# Altium PCB cps_tc_onoff_sw.PcbDoc
Units mm, origin at the board's own origin, x right, y up, seen from the top; angles counter-clockwise.
Board outline 40 x 22 mm, 2 copper layers (Top Layer, Bottom Layer); 12 components, 9 nets, 35 pads, 10 vias.
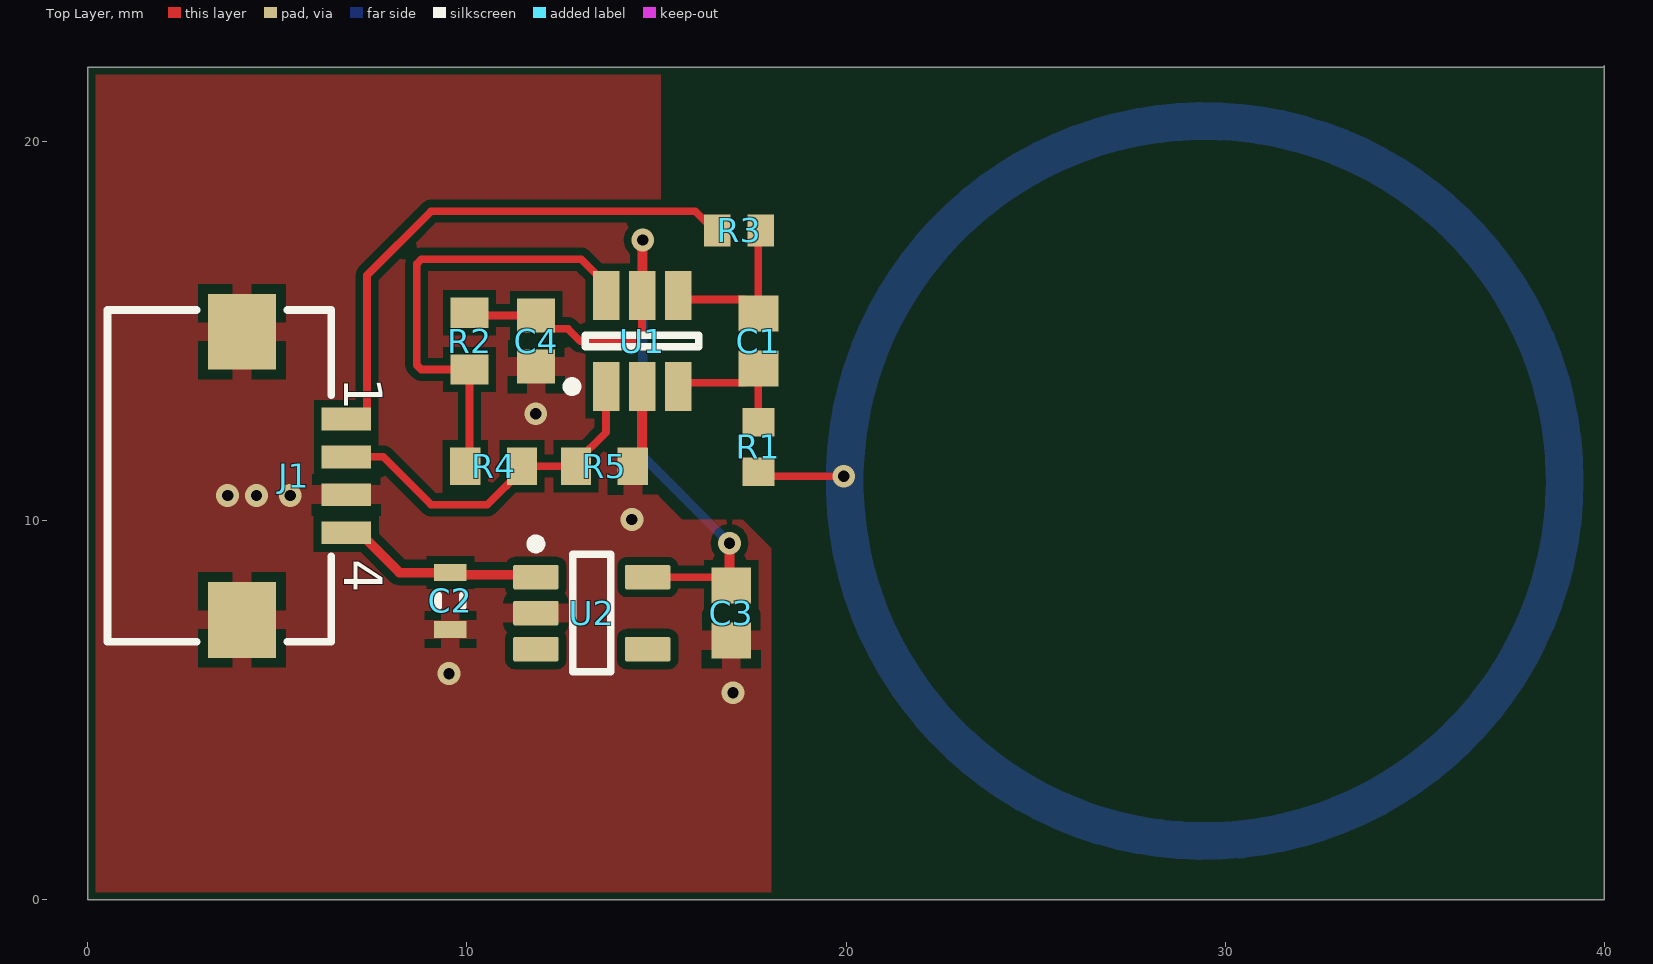
[diagram p0: Top Layer view]
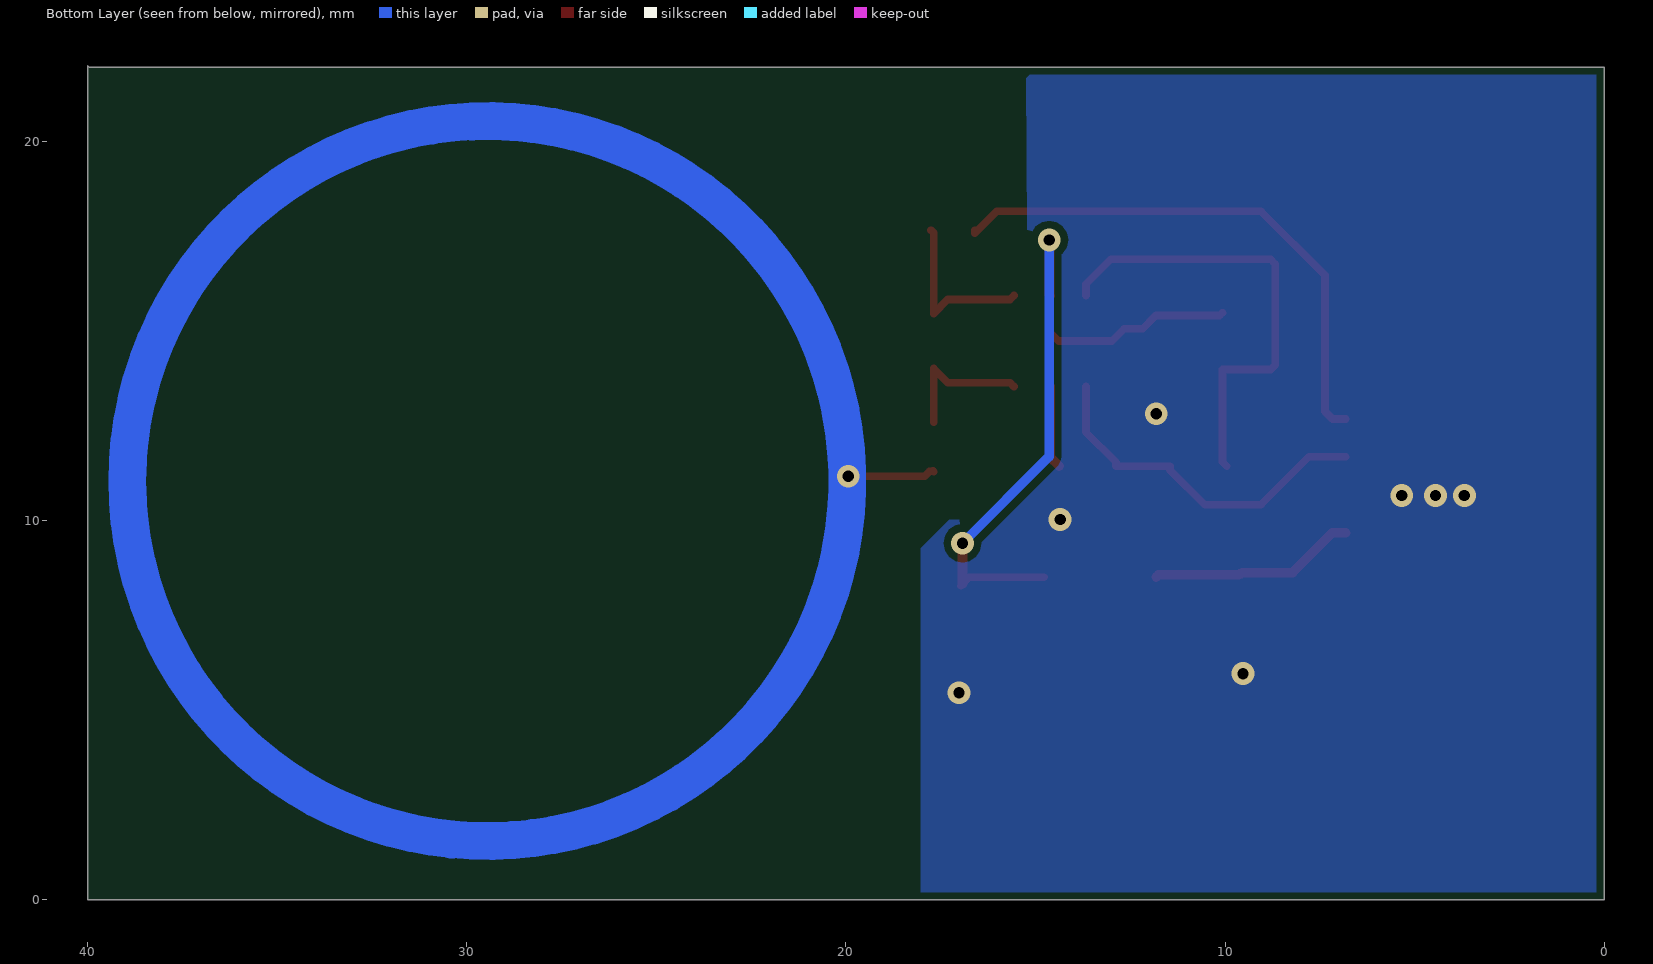
[diagram p1: Bottom Layer view, seen from below]

## Layer stack, top to bottom
Top Solder: solder mask 0.0102, Solder Resist, Dk 3.5
Top Layer: signal copper 0.0356
Dielectric 1: dielectric 0.32, FR-4, Dk 4.8
Bottom Layer: signal copper 0.0356
Bottom Solder: solder mask 0.0102, Solder Resist, Dk 3.5

## Board outline
0,0 40,0 40,22 39.971,21.971 0,21.971

## Design rules (kind name [scope] priority, off if disabled: settings)
BoardOutlineClearance [All] p1: gap=0.2 ignorepadtopadclearanceinfootprint=FALSE except(0.4: Arc-SplitBarrior Arc-SplitContinuation Track-SplitBarrior Track-SplitContinuation SMDPad-SplitBarrior SMDPad-SplitContinuation THPad-SplitBarrior THPad-SplitContinuation Via-SplitBarrior Via-SplitContinuation Fill-SplitBarrior Fill-SplitContinuation Poly-SplitBarrior Poly-SplitContinuation Region-SplitBarrior Region-SplitContinuation Text-SplitBarrior Text-SplitContinuation)
Clearance "Clearance Bottom Layer" [OnLayer('Bottom Layer')] p1: gap=0.203 ignorepadtopadclearanceinfootprint=TRUE except(0.254: Arc-Text Track-Text SMDPad-Text THPad-Text Via-Text Fill-Text Poly-Text Region-Text Text-Text)
Clearance "Clearance Top Layer" [OnLayer('Top Layer')] p2: gap=0.203 ignorepadtopadclearanceinfootprint=TRUE except(0.254: Arc-Text Track-Text SMDPad-Text THPad-Text Via-Text Fill-Text Poly-Text Region-Text Text-Text)
Clearance [All] p3: gap=0.2 ignorepadtopadclearanceinfootprint=FALSE except(0.089: Arc-Arc Arc-Track Arc-SMDPad Track-Track Track-SMDPad SMDPad-SMDPad; 0.127: Arc-Via Track-Via SMDPad-Via THPad-Via Via-Via; 0.254: Arc-Text Track-Text SMDPad-Text THPad-Text Via-Text Fill-Text Poly-Text Region-Text Text-Text)
HoleSize [All] p1: absolutevalues=TRUE maxlimit=6.3 minlimit=0.2 maxpercent=80.000 minpercent=20.000
MinimumAnnularRing [All] p1: minimumring=0.076
MinimumSolderMaskSliver [All] p1: minsoldermaskwidth=0.1
PolygonConnect PolygonConnect_1 [All] p1: thpad.connectstyle=Relief thpad.reliefconductorwidth=0.508 thpad.reliefentries=4 thpad.polygonreliefangle="90 Angle" thpad.airgapwidth=0.254 smdpad.connectstyle=Relief smdpad.reliefconductorwidth=0.508 smdpad.reliefentries=4 smdpad.polygonreliefangle="90 Angle" smdpad.airgapwidth=0.254 via.connectstyle=Direct via.reliefconductorwidth=0.508 via.reliefentries=4 via.polygonreliefangle="90 Angle" via.airgapwidth=0.254
RoomDefinition TC_TouchSwitch [InComponentClass('TC_TouchSwitch')] p1: confinementstyle=ConfineIn formatcopy=TRUE lockcomponents=FALSE outline 0.035,5.217 19.085,5.217 19.085,18.552 0.035,18.552
RoutingCorners [All] p1: cornerstyle=Round minsetback=2.54 maxsetback=2.54
RoutingVias [All] p1: holewidth=0.5 width=1 viastyle="Through Hole" minholewidth=0.2 minwidth=0.45 maxholewidth=1 maxwidth=2
SilkToSilkClearance [All] p1: silktosilkclearance=0.1
SilkToSolderMaskClearance [IsPad] p1: minsilkscreentomaskgap=0.1 clearancetoexposedcopper=TRUE
SolderMaskExpansion [All] p1: expansion=0.102
Width sense_circle [InNet('SW_SENSE')] p1: maxlimit=20 minlimit=0.089 preferedwidth=0.254 minimp=50.000000 maximp=50.000000 favimp=50.000000
Width [All] p2: maxlimit=2.54 minlimit=0.089 preferedwidth=0.381
25 further rules are at their usual default settings.

## Components (designator, comment, footprint, x,y, rotation, side; value= is the part's Value field where it differs from the comment)
C1 "2.2nF - 50nF" CAPC1608X90X35ML10T15 17.688,14.742 r270 top
C2 "1uF" CAPC1608X90X20LL10 9.56,7.884 r90 top
C3 "2.2uF" CAPC1608X90X35ML10T15 16.975,7.564 r90 top
C4 "0.1uF" CAPC1608X87X35NL15T15 11.825,14.742 r270 top
J1 "686104148922" 686104148922 3.464,11.186 r270 top
R1 "10k" RESC1609X55X30LL15T15 17.688,11.948 r90 top
R2 "N.M." RESC1608X55X25ML10T15 10.068,14.742 r90 top
R3 "1M" RESC1609X50X30LL10T20 17.18,17.663 r180 top
R4 "N.M." RESC1608X55X25ML10T15 10.703,11.44 r180 top
R5 "N.M." RESC1608X55X25ML10T15 13.624,11.44 r180 top
U1 "AT42QT1012-TSHR" 6ST1_M 14.619,14.742 r90 top
U2 "TPS70933DBVR" DBV0005A_M 13.292,7.564 r0 top

## Footprints (in the part's own frame and the unit in brackets; to place one, negate y for a bottom-side part, rotate by r counter-clockwise, add the part's x,y. Pads: shape width x height; smd on the part's side, far side on the other; paste and mask are expansions set on the pad)
6ST1_M [mm] "SOT23, 6-Leads, Body 2.9x1.6mm, Pitch 0.95mm, Lead Span 2.8mm, IPC Low Density"
  rect 1.3x0.7 smd: 1(-1.2,0.95) 2(-1.2,0) 3(-1.2,-0.95) 4(1.2,-0.95) 5(1.2,0) 6(1.2,0.95)
  silkscreen extent -1.32,-1.5 0.15,1.97, body extent -0.87,-1.5 0.87,1.5, height 1.45
686104148922 [mm] "ZIF Connectors, Horizontal, Bottom Contact Hinge Type, pitch 1mm, 4p"
  rect 0.6x1.3 smd: 1(-1.5,3.35) 2(-0.5,3.35) 3(0.5,3.35) 4(1.5,3.35)
  rect 2x1.8 smd: MP1(-3.8,0.6) MP2(3.8,0.6)
  silkscreen extent -4.38,-2.95 4.38,2.95, body extent -4.3,-2.9 4.3,3.6, height 2.27
CAPC1608X87X35NL15T15 [mm] "Chip Capacitor, 2-Leads, Body 1.60x0.80mm, IPC Medium Density"
  rect 0.9x1 smd: 1(-0.675,0) 2(0.675,0)
  body extent -0.87,-0.48 0.87,0.47, height 0.87
CAPC1608X90X20LL10 [mm] "Chip Capacitor, 2-Leads, Body 1.70x0.90mm, IPC High Density"
  rect 0.45x0.85 smd: 1(-0.75,0) 2(0.75,0)
  silkscreen extent -0.15,-0.33 0.15,0.33, body extent -0.85,-0.45 0.85,0.45, height 0.9
CAPC1608X90X35ML10T15 [mm] "Chip Capacitor, 2-Leads, Body 1.7x0.9mm, IPC Low Density"
  rect 0.95x1.05 smd: 1(-0.725,0) 2(0.725,0)
  body extent -0.85,-0.45 0.85,0.45, height 0.9
DBV0005A_M [mm] "SOT23, 5-Leads, Body 3.05x1.75mm, Pitch 0.95mm, IPC Low Density"
  rrect15% 1.2x0.65 smd: 1(-1.475,0.95) 2(-1.475,0) 3(-1.475,-0.95) 4(1.475,-0.95) 5(1.475,0.95)
  silkscreen extent -1.6,-1.55 0.5,1.95, body extent -1.42,-1.46 1.42,1.46, height 1.08
RESC1608X55X25ML10T15 [mm] "Chip Resistor, 2-Leads, Body 1.60x0.80mm, IPC Low Density"
  rect 0.8x1 smd: 1(-0.75,0) 2(0.75,0)
  body extent -0.85,-0.45 0.85,0.45, height 0.55
RESC1609X50X30LL10T20 [mm] "Chip Resistor, 2-Leads, Body 1.55x0.85mm, IPC High Density"
  rect 0.7x0.85 smd: 1(-0.575,0) 2(0.575,0)
  body extent -0.82,-0.48 0.82,0.48, height 0.5
RESC1609X55X30LL15T15 [mm] "Chip Resistor, 2-Leads, Body 1.75x0.95mm, IPC High Density"
  rect 0.75x0.85 smd: 1(-0.65,0) 2(0.65,0)
  body extent -0.87,-0.48 0.87,0.48, height 0.55

## Part data
C1: library part CMP-2100-03642-1, "Chip Capacitor, 10 nF, +/- 10%, 50 V, -55 to 125 degC, 0603 (1608 Metric), RoHS, Tape and Reel", Capacitance=10nF, Case/Package=0603, Case Code (Metric)=1608, Dielectric=X7R, Dielectric Material=Ceramic, Insulation Resistance=10GR, Manufacturer=Murata, Max Operating Temperature=125degC, Min Operating Temperature=-55degC, Package Description="2-Pin Surface Mount Device, Body 1.6 x 0.8 mm", Package Quantity=1, Tolerance=10%, Voltage=50V, Case Code (Imperial)=0603, Datasheet URL=http://search.murata.co.jp/Ceramy/image/img/A01X/G101/ENG/GRM188R71H103KA01-01.pdf, Datasheet Version=42401.0, Depth=0.8mm, Height=0.8mm, Lead Free=LeadFree, Length=1.6mm, Manufacturer URL=http://www.murata.com/, Material=Ceramic, Mount=SurfaceMount, Number of Pins=2, Package Reference=0603, Packaging=TapeandReel, REACH SVHC=Unknown, RoHSCompliant=True, Termination=SMD/SMT, Thickness=0.035inch, Voltage Rating=50V, Voltage Rating (DC)=50V, Width=0.031inch
C2: library part CMP-2000-06025-1, "Chip Capacitor, 1 uF, +/- 10%, 50 V, -55 to 85 degC, 0603 (1608 Metric), RoHS, Tape and Reel", Capacitance=1µF, Manufacturer=TDK, Operating Temperature=-55°C~85°C, Package / Case=0603(1608Metric), Package Description="2-Pin Surface Mount Device, Body 1.6 x 0.8 mm", Package Reference=0603, PCN Part Number=MLCCPartNumberChange30/Nov/2012, Ratings=-, Standard Package=1, Temperature Coefficient=X5R, Tolerance=±10%, Voltage - Rated=50V, Applications=GeneralPurpose, Category=Capacitors, Datasheet URL=https://product.tdk.com/info/en/catalog/datasheets/mlcc_commercial_general_en.pdf, Datasheet Version=08/2016, Design Resources=20WNon-IsolatedBuckLEDDriverUsingPLLNK460KG, Family=CeramicCapacitors, Features=-, Height - Seated (Max)=-, Lead Spacing=-, Lead Style=-, Manufacturer URL=http://www.tdk.com/, Mounting Technology=SurfaceMount, Mounting Type=SurfaceMount,MLCC, Online Catalog=CSeries,GeneralPurpose, Other Names=445-7468-6, Packaging=Digi-Reel®, Product Training Modules=CSeriesGeneralApplicationsSEAT,CCV,andTVCLDesignToolsGuidetoReplacinganElectrolyticCapacitorwithanMLCC, RoHS Information=RoHSCertificate-MLCC, Series=C, Size / Dimension="0.063\"Lx0.031\"W(1.60mmx0.80mm)", Thickness (Max)="0.035\"(0.90mm)"
C3: library part CMP-2006-02836-1, Manufacturer=Murata, Part Number=GRM188R71A225KE15D
C4: library part CMP-2006-03300-1, Manufacturer=Kemet, Part Number=C0603X104K5RACTU
J1: library part CMP-1502-01512-1, "SMT ZIF Connectors Hinge Type WR-FPC, Horizontal, Bottom Contact, pitch 1 mm, 4 pins", Contact Resistance=50mOhm, Manufacturer="Wurth Elektronik", Operating Temperature=-40to105degC, Rated Current=1A, Withstanding Voltage=500VAC, Working Voltage=100VAC, Contact Design=BottomContact, Datasheet URL=https://katalog.we-online.de/em/datasheet/686104148922.pdf, Manufacturer URL=http://www.we-online.de, Mounting Technology=SMT, Orientation=Horizontal, Package Reference=686104148922, Packaging=TapeandReel, Part Number=686104148922, Pin Number=4, Pitch=1mm, Publisher=WurthElektronik
R1: library part CMP-2000-07452-1, "Chip Resistor, 10 KOhm, +/- 1%, 0.1 W, -55 to 155 degC, 0603 (1608 Metric), RoHS, Tape and Reel", Case\/Package=0603, Case Code (Metric)=1608, Manufacturer=Panasonic, Max Operating Temperature=155degC, Max Power Dissipation=100mW, Min Operating Temperature=-55degC, Package Description="2-Pin Surface Mount Device, Body 1.6 x 0.85 mm", Package Quantity=1, Package Reference=603, Resistance=10KOhm, Temperature Coefficient=100ppm\/degreesC, Tolerance=1%, Voltage Rating=75V, Case Code (Imperial)=0603, Composition=ThickFilm, Contact Plating=Tin, Datasheet URL=https://industrial.panasonic.com/cdbs/www-data/pdf/RDA0000/AOA0000C304.pdf, Datasheet Version=02/2017, Depth=0.8mm, Height=0.45mm, Lead Free=LeadFree, Length=1.6mm, Manufacturer URL=http://www.panasonic.com/, Military Standard=Not, Mount=SurfaceMount, Mounting Technology=SurfaceMount, Number of Pins=2, Number of Terminations=2, Packaging=TapeandReel, Power Rating=100mW, Radiation Hardening=No, REACH SVHC=NoSVHC, RoHSCompliant=true, Termination=SMD/SMT, Voltage Rating (DC)=75V, Width=0.031inch
R2 R4 R5: library part CMP-2100-03662-1, "Chip Resistor, 100 KOhm, +/- 1%, 0.1 W, -55 to 155 degC, 0603 (1608 Metric), RoHS, Tape and Reel", Case/Package=0603, Case Code (Metric)=1608, Manufacturer=Yageo, Max Operating Temperature=155degC, Min Operating Temperature=-55degC, Package Description="2-Pin Surface Mount Device, Body 1.6 x 0.8 mm", Power Rating=100mW, Resistance=100KOhm, Temperature Coefficient=100ppm/degreesC, Tolerance=1%, Voltage Rating=50V, Case Code (Imperial)=0603, Composition=ThickFilm, Datasheet URL=http://www.yageo.com/NewPortal/yageodocoutput?fileName=/pdf/R-Chip/PYu-RC_Group_51_RoHS_L_5.pdf, Datasheet Version="Rev. 5, 10/2016", Depth=0.8mm, Height=0.45mm, Lead Free=LeadFree, Length=1.6mm, Manufacturer URL=http://www.yageo.com/, Military Standard=Not, Number of Pins=2, Package Reference=0603, Packaging=TapeandReel, REACH SVHC=NoSVHC, RoHSCompliant=true, Termination=SMD/SMT, Voltage Rating (DC)=50V, Width=0.8mm
R3: library part CMP-2000-03013-1, Manufacturer="Vishay Dale", Part Number=CRCW06031M00FKEA
U1: library part CMP-0073-00037-1, "One-channel Toggle-mode Touch Sensor IC with Power Management Functions, -40° to +85° C, 6-pin SOT23", Code_IPC=SOT26A-6, Code_JEDEC=MO-178-AB, ComponentLink1Description="Manufacturer URL", ComponentLink1URL=http://www.atmel.com/, ComponentLink2Description=Datasheet, ComponentLink2URL=http://www.atmel.com/Images/doc9543.pdf, DatasheetVersion="revD, Aug-2010", PackageDescription="6-Lead, 2.90 x 1.60 mm Plastic Small Outline Package (SOT23)", PackageReference=6ST1, PackageVersion="revA, Jun-2008"
U2: library part CMP-0394-00329-2, "Single Output LDO, 100 mA, Adjustable 1.2 to 5.5 V Output, 2.7 to 10 V Input, with Low IQ, 5-pin SOT-23 (DBV), -40 to 125 degC, Green (RoHS & no Sb/Br)", Manufacturer="Texas Instruments", PartNumber=TPS76901DBVR, Rating=Catalog, Accuracy(%)=3, Code_JEDEC=MO-178, ComponentLink1Description="Manufacturer URL", ComponentLink1URL=http://www.ti.com/, ComponentLink2Description=Datasheet, ComponentLink2URL=http://www.ti.com/general/docs/lit/getliterature.tsp?genericPartNumber=TPS76901&fileType=pdf, ComponentLink3Description="Package Specification", ComponentLink3URL=http://www.ti.com/litv/pdf/mpds018i, ComponentLink4Description="URL Link1", ComponentLink4URL="Samples URL:http://www.ti.com/product/tps76901#samples", DatasheetVersion=SLVS203E, Eco-Plan="Green (RoHS & no Sb/Br)", Iout(Max)(A)=0.1, Iq(Typ)(mA)=0.02, Mounting Technology="Surface Mount", PackageDescription="5-Pin Plastic Small Outline, Body 1.60 Ã— 2.90 mm, Pitch 0.95 mm", PackageReference=DBV0005A, PackageVersion=4073253-4/K, SubFamily="Single Channel LDO", Vdo(Typ)(mV)=71, Vin(Max)(V)=10, Vin(Min)(V)=2.7, Vout Adj(Max)(V)=5.5, Vout Adj(Min)(V)=1.2

## Via types
v1: diameter 0.6, hole 0.3, Top Layer to Bottom Layer, 10 vias

## Nets (pads, with @x,y where several pads share a name; then routed paths per layer and width w, separated by ;. In a path a pad name is that pad's centre, name@x,y a point inside that pad or via, vN(x,y) a via of type N, cw(c..) or ccw(c..) an arc to the next point about the centre after c; other vN are vias at no path point)
AO_OVERRIDE: J1.1 R3.2 | length 14.5
  Top Layer w0.203: J1.1 7.164,12.686 7.362,12.884 7.362,16.481 9.052,18.171 16.022,18.171 16.605,17.588 R3.2
GND: C2.1 C3.1 C4.2 J1.3 J1.MP1 J1.MP2 R5.1 U1.2 U2.2 | length 2.2
  Top Layer w0.254: R5.1 14.619,11.685 U1.2
  other v1: 17.018,5.461 9.525,5.969 14.351,10.033 3.683,10.668 4.445,10.668 5.334,10.668 11.811,12.827
SNS: C1.1 R3.1 U1.4 | length 4.5
  Top Layer w0.203: U1.4 15.671,15.84 17.315,15.84 C1.1 17.688,17.596 R3.1
SNSK: C1.2 R1.2 U1.3 | length 3.7
  Top Layer w0.203: U1.3 15.671,13.644 17.315,13.644 C1.2 R1.2
SW3V3: C3.2 C4.1 R2.2 U1.5 U2.5 | length 19.7
  Top Layer w0.203: R2.2 10.143,15.417 C4.1 12.173,15.069 12.662,15.069 12.989,14.742 14.386,14.742 14.619,14.975 U1.5 ; U2.5 16.75,8.514 16.926,8.338 C3.2
  Top Layer w0.254: U1.5 14.629,15.953 14.629,17.399 v1(14.64,17.409) ; C3.2@16.926,8.338 v1(16.926,9.408)
  Bottom Layer w0.254: v1(14.64,17.409) 14.64,11.694 v1(16.926,9.408)
SW_OUT: J1.2 R4.1 R5.2 U1.1 | length 9.5
  Top Layer w0.203: J1.2 7.79,11.686 9.052,10.424 10.537,10.424 11.453,11.34 R4.1 R5.2 12.874,11.54 13.669,12.335 U1.1
SW_SENSE: R1.1 | length 61.9
  Top Layer w0.203: R1.1 R1.1@17.703,11.313 ; R1.1@17.795,11.303 17.922,11.176 v1(19.939,11.176)
  Bottom Layer w1: 38.964,11.049 ccw(c29.464,11.049) 38.964,11.049
TIME: R2.1 R4.2 U1.6 | length 12.3
  Top Layer w0.203: R4.2 10.068,11.555 R2.1 8.79,13.992 8.671,14.111 8.671,16.774 8.798,16.901 13.01,16.901 13.669,16.242 U1.6
VIN: C2.2 J1.4 U2.1 | length 5.5
  Top Layer w0.254: J1.4 7.164,9.686 8.216,8.634 C2.2 9.62,8.574 11.757,8.574 U2.1
pads on no net: U2.3 U2.4

## Polygon pours and split planes (outlines as drawn)
GND on Bottom Layer "GND_L02_P004" (solid, pour order 4): 15.175,10.683 15.225,10.683 15.875,10.033 17.272,10.033 18.034,9.271 18.034,0 0,0 0,21.971 15.24,21.971
GND on Top Layer "GND_L01_P002" (solid, pour order 2): 15.113,10.594 15.674,10.033 17.272,10.033 18.034,9.271 18.034,0 17.653,0 0,0 0,21.971 14.605,21.971 15.113,21.971

## Silkscreen, mask and mechanical layers (free items; w line width, h text height)
Outline:
  lines w0.254: 0,0 0,21.971 40.005,21.971 40.005,0 0,0

## Text inside footprints (layer, text, board x,y; h text height)
J1: Top Overlay "1" at 6.764,13.786 h1.02 r270; Top Overlay "4" at 6.764,8.986 h1.02 r270